# Altium PCB PCB_Ecoder_Optic_Sensor_SMT-RA.PcbDoc
Units mm, origin at the board's own origin, x right, y up, seen from the top; angles counter-clockwise.
Board outline 20.6 x 27 mm, 2 copper layers (Top Layer, Bottom Layer), stack 1.571 mm thick; 33 components, 15 nets, 89 pads, 23 vias.
Unrouted connection lines stored in the file: 4.
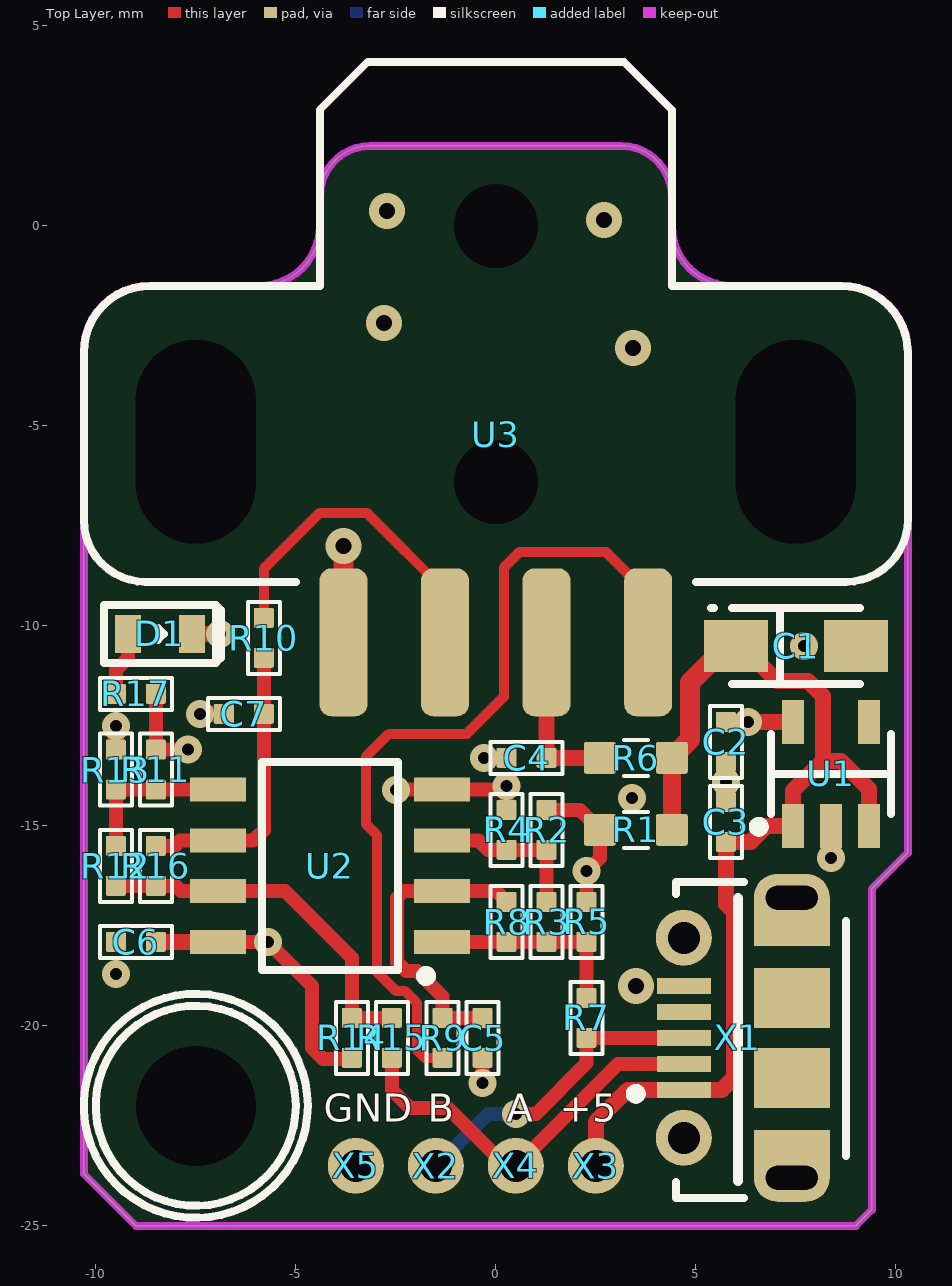
[diagram p0: Top Layer view]
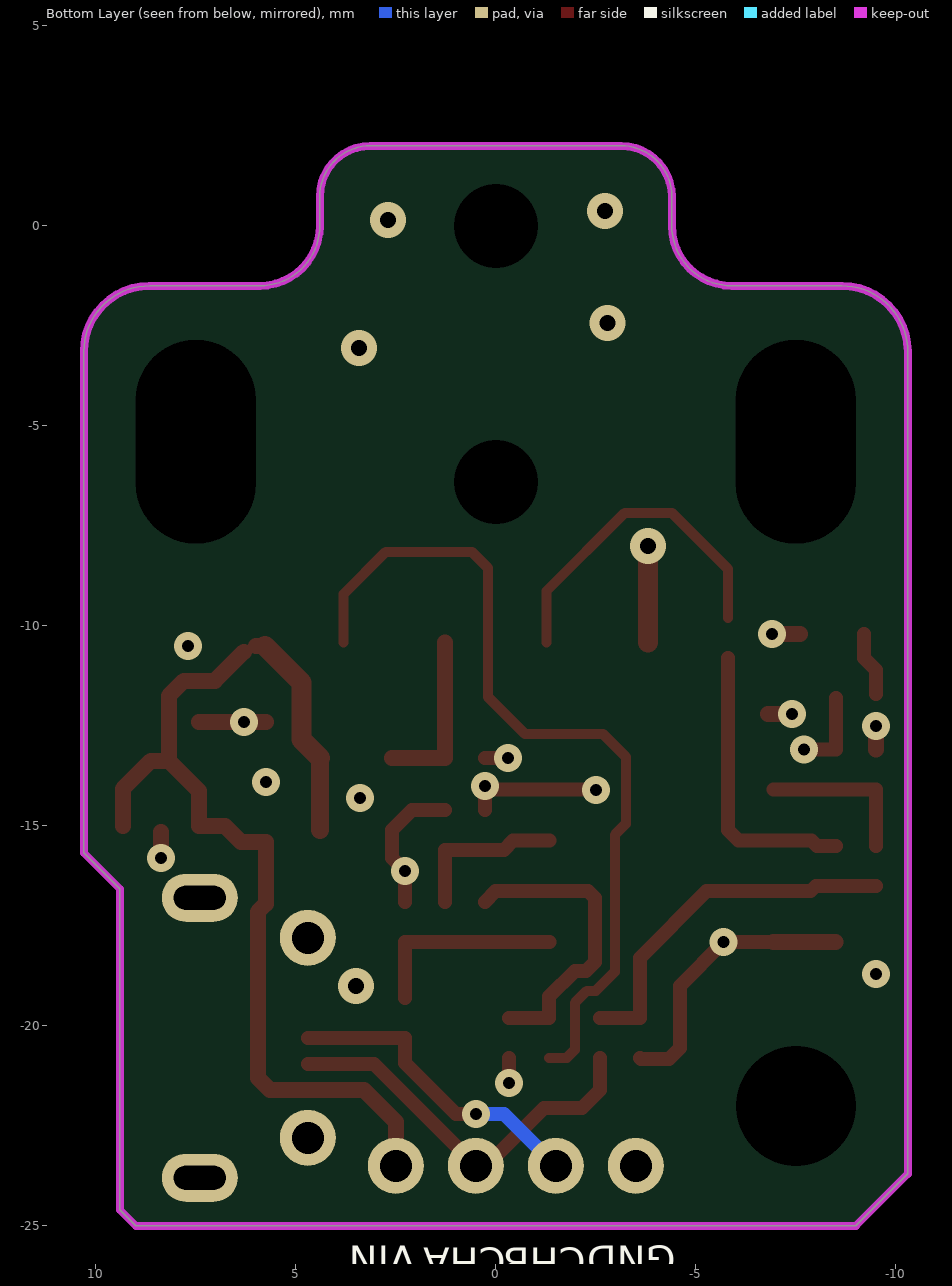
[diagram p1: Bottom Layer view, seen from below]
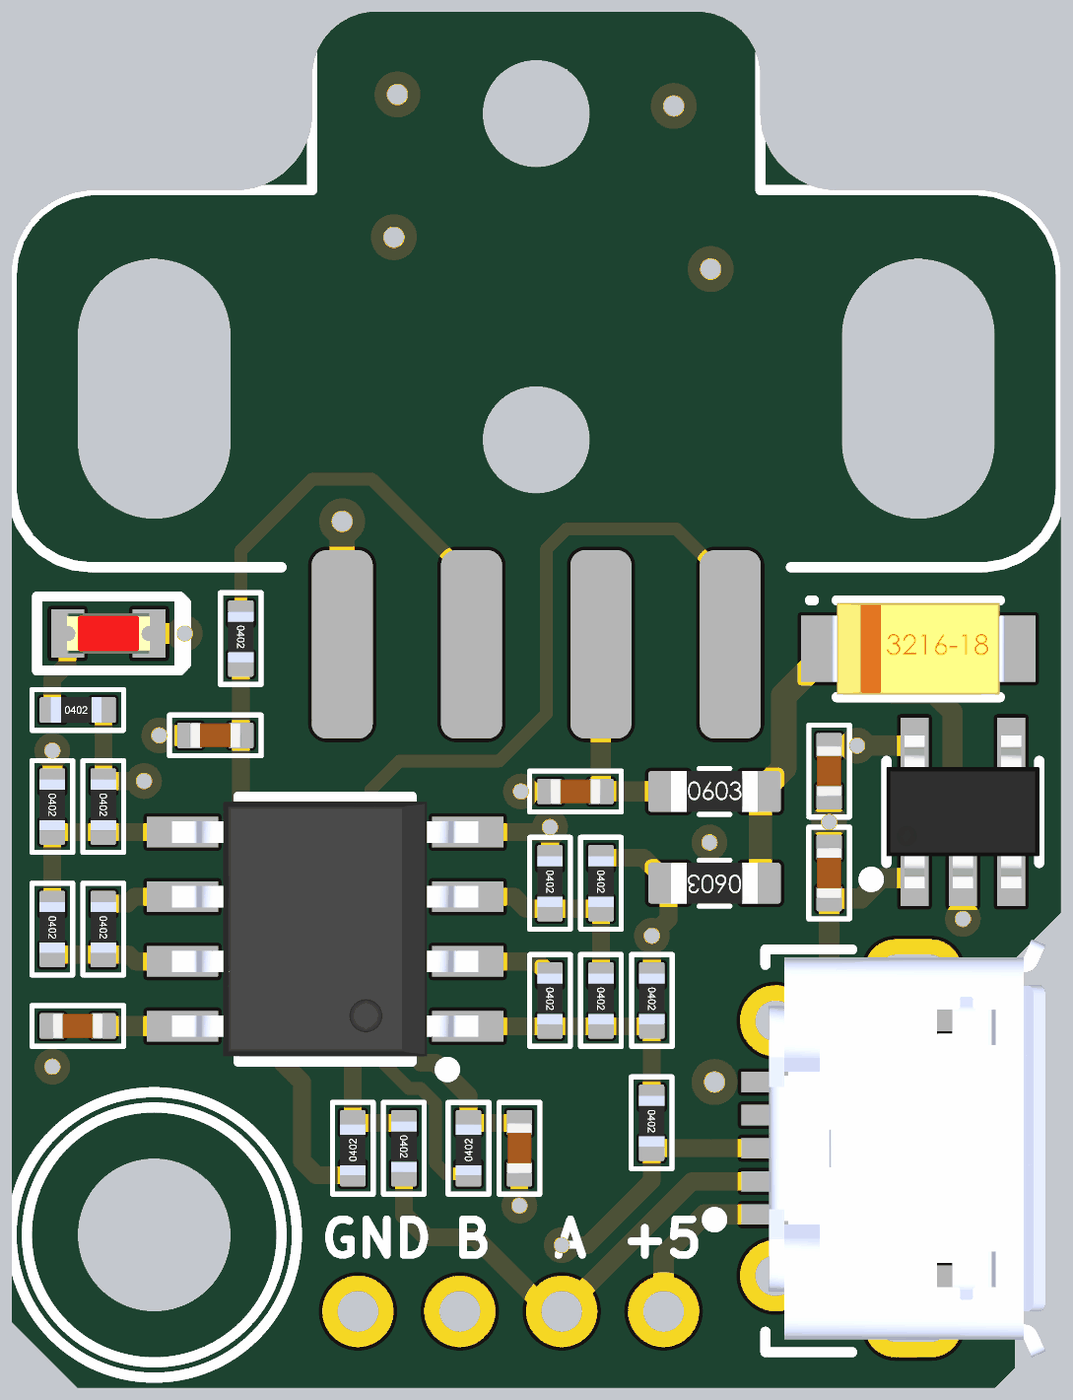
[diagram p2: 3D render of the assembled board from above, using the file's embedded part models]

## Layer stack, top to bottom
Top Solder: solder mask 0.0102, Solder Resist, Dk 3.5
Top Layer: signal copper 0.0356
Dielectric 1: dielectric 1.5, FR-4, Dk 4.8
Bottom Layer: signal copper 0.0356
Bottom Solder: solder mask 0.0102, Solder Resist, Dk 3.5

## Board outline
-10.3,-23.7 -9,-25 9,-25 9.4,-24.6 9.4,-16.575 10.3,-15.675 10.3,-3.148 ccw(c8.652,-3.148) 8.652,-1.5 5.9,-1.5 cw(c5.9,0) 4.4,0 4.4,0.73 ccw(c3.13,0.73) 3.13,2 -3.13,2 ccw(c-3.13,0.73) -4.4,0.73 -4.4,0 cw(c-5.9,0) -5.9,-1.5 -8.652,-1.5 ccw(c-8.652,-3.148) -10.3,-3.148

## Design rules (kind name [scope] priority, off if disabled: settings)
Clearance Clearance_KeepOut_Oll [OnLayer('Keep-Out Layer') vs OnLayer('Top Layer') Or OnLayer('Bottom Layer')] p1: gap=0.35 ignorepadtopadclearanceinfootprint=FALSE except(0: Arc-Hole Track-Hole SMDPad-Hole THPad-Hole Via-Hole Fill-Hole Poly-Hole Region-Hole Text-Hole)
Clearance Clearance_Hole_All [IsPad and (PadIsPlated <> 'True')] p2: gap=0.35 ignorepadtopadclearanceinfootprint=FALSE except(0: Arc-Hole Track-Hole SMDPad-Hole THPad-Hole Via-Hole Fill-Hole Poly-Hole Region-Hole Text-Hole)
Clearance Clearance_AllPoligon_All [InPoly] p3: gap=0.2 ignorepadtopadclearanceinfootprint=FALSE except(0: Arc-Hole Track-Hole SMDPad-Hole THPad-Hole Via-Hole Fill-Hole Poly-Hole Region-Hole Text-Hole)
Clearance [All] p4: gap=0.2 ignorepadtopadclearanceinfootprint=FALSE except(0: Arc-Hole Track-Hole SMDPad-Hole THPad-Hole Via-Hole Fill-Hole Poly-Hole Region-Hole Text-Hole)
ComponentClearance [All] p1: gap=0 collisioncheckmode=3 verticalgap=0 showdistances=FALSE
HoleSize [All] p1: absolutevalues=TRUE maxlimit=6 minlimit=0.2 maxpercent=80.000 minpercent=20.000
HoleToHoleClearance [All] p1: gap=0.25 allowstackedmicrovias=TRUE
MinimumSolderMaskSliver [All] p1: minsoldermaskwidth=0.06
MinimumSolderMaskSliver SilkscreenOverComponentPads [All] p2: minsoldermaskwidth=0.254
PlaneConnect [All] p1: planeconnectstyle=Relief reliefexpansion=0.1 reliefentries=4 reliefconductorwidth=0.4 reliefairgap=0.2
PolygonConnect PolygonConnect_isVia [IsVia] p1: connectstyle=Direct reliefconductorwidth=0.254 reliefentries=4 polygonreliefangle="90 Angle" airgapwidth=0.254
PolygonConnect [All] p2: connectstyle=Relief reliefconductorwidth=0.4 reliefentries=4 polygonreliefangle="90 Angle" airgapwidth=0.2
RoutingCorners [All] p1: cornerstyle=45-Degree minsetback=0.5 maxsetback=5
RoutingVias [All] p1: holewidth=0.6 width=0.9 viastyle="Through Hole" minholewidth=0.2 minwidth=0.6 maxholewidth=5 maxwidth=8
ShortCircuit [InNet('GND') vs InNet('NetC13_2')] p1: allowed=TRUE
ShortCircuit ShortCircuit_1 [All] p2: allowed=FALSE
SilkToSilkClearance [All] p1: silktosilkclearance=0.102
SilkToSolderMaskClearance [IsPad] p1: minsilkscreentomaskgap=0.102 clearancetoexposedcopper=TRUE
SolderMaskExpansion [All] p1: expansion=0.07
Width [All] p1: maxlimit=2 minlimit=0.18 preferedwidth=0.4
21 further rules are at their usual default settings.

## Components (designator, comment, footprint, x,y, rotation, side; value= is the part's Value field where it differs from the comment)
C1 "TCAP CASE A" "TCAP SMA" 7.5,-10.5 r0 top value=22uF
C2 "Ceramic Capacitor X7R 10% 50V" C0402-h0.5-O 5.75,-12.9 r90 top value=100nF
C3 "Ceramic Capacitor X7R 10% 50V" C0402-h0.5-O 5.75,-14.9 r270 top value=100nF
C4 "Ceramic Capacitor X7R 10% 50V" C0402-h0.5-O 0.77,-13.3 r0 top value=100nF
C5 "Ceramic Capacitor X7R 10% 50V" C0402-h0.5-O -0.33,-20.3 r90 top value=33pF
C6 "Ceramic Capacitor X7R 10% 50V" C0402-h0.5-O -9,-17.9 r0 top value=100nF
C7 "Ceramic Capacitor X7R 10% 50V" C0402-h0.5-O -6.3,-12.2 r0 top value=33pF
D1 "LED 0603" "LED 0603_RED" -8.4,-10.2 r0 top value=RED
R1 "Thick Film Resistor 0603 5%" R0603 3.5,-15.1 r180 top value=DNP
R2 "Thick Film Resistor 0402 5%" R0402-O 1.27,-15.1 r270 top value=3.3k
R3 "Thick Film Resistor 0402 5%" R0402-O 1.27,-17.4 r270 top value=22k
R4 "Thick Film Resistor 0402 5%" R0402-O 0.27,-15.1 r270 top value=1.2k
R5 "Thick Film Resistor 0402 5%" R0402-O 2.27,-17.4 r270 top value=1k
R6 "Thick Film Resistor 0603 5%" R0603 3.5,-13.3 r0 top value=180R
R7 "Thick Film Resistor 0402 5%" R0402-O 2.265,-19.8 r270 top value=50R
R8 "Thick Film Resistor 0402 5%" R0402-O 0.27,-17.4 r270 top value=DNP
R9 "Thick Film Resistor 0402 5%" R0402-O -1.33,-20.3 r90 top value=180R
R10 "Thick Film Resistor 0402 5%" R0402-O -5.8,-10.3 r270 top value=180R
R11 "Thick Film Resistor 0402 5%" R0402-O -8.5,-13.595 r270 top value=3.3k
R12 "Thick Film Resistor 0402 5%" R0402-O -9.5,-16 r270 top value=22k
R13 "Thick Film Resistor 0402 5%" R0402-O -9.5,-13.595 r270 top value=1.2k
R14 "Thick Film Resistor 0402 5%" R0402-O -3.6,-20.3 r90 top value=1k
R15 "Thick Film Resistor 0402 5%" R0402-O -2.6,-20.3 r270 top value=50R
R16 "Thick Film Resistor 0402 5%" R0402-O -8.5,-16 r270 top value=DNP
R17 "Thick Film Resistor 0402 5%" R0402-O -9,-11.7 r0 top value=1.2k
U1 "TLV70233" SOT-23-5 8.375,-13.7 r90 top
U2 "LM2903" SOIC-8-150 -4.145,-16 r180 top
U3 "Q9845" "SENSOR_OPTO-Encoder Rp" 0,0 r180 top locked
X1 "ZX62-AB-5PA(11)" USB_micro_TH 9.6,-20.3 r270 top locked
X2 "PAD_C_1.2MM" PAD_C_1.2mm -1.5,-23.5 r90 top
X3 "PAD_C_1.2MM" PAD_C_1.2mm 2.5,-23.5 r90 top
X4 "PAD_C_1.2MM" PAD_C_1.2mm 0.5,-23.5 r90 top
X5 "PAD_C_1.2MM" PAD_C_1.2mm -3.5,-23.5 r90 top

## Footprints (in the part's own frame and the unit in brackets; to place one, negate y for a bottom-side part, rotate by r counter-clockwise, add the part's x,y. Pads: shape width x height; smd on the part's side, far side on the other; paste and mask are expansions set on the pad)
C0402-h0.5-O [mm] "Ceramic Capacitor SMT 0402 h=0.5 outline"
  rrect15% 0.5x0.5 smd mask+0.05: 1(-0.5,0) 2(0.5,0)
  silkscreen extent -0.9,-0.4 0.9,0.4, body extent -0.5,-0.25 0.5,0.25, height 0.51
"LED 0603_RED" [mm]
  rect 0.65x0.95 smd: 1(-0.8,0) 2(0.8,0)
  silkscreen extent -1.4,-0.72 1.53,0.72, body extent -0.81,-0.4 0.81,0.4, height 0.6
PAD_C_1.2mm [mm]
  round 1.4 hole 0.8: 1(0,0)
R0402-O [mm]
  rrect15% 0.5x0.5 smd mask+0.05: 1(-0.5,0) 2(0.5,0)
  silkscreen extent -0.9,-0.4 0.9,0.4, body extent -0.53,-0.25 0.47,0.25, height 0.36
R0603 [mm]
  rrect15% 0.8x0.8 smd: 1(-0.9,0) 2(0.9,0)
  silkscreen extent -0.3,-0.45 0.3,0.45, body extent -0.85,-0.4 0.85,0.4, height 0.56
"SENSOR_OPTO-Encoder Rp" [mm] "HEDS-97** Option 51"
  round 0 hole 3 slot 5.1 at 90 deg unplated: 0(-7.5,5.4) 0(7.5,5.4)
  round 0 hole 2.1 unplated: 0(0,6.4) 0(0,0)
  rrect50% 1.2x3.7 smd: 1(3.81,10.414) 2(1.27,10.414) 3(-1.27,10.414) 4(-3.81,10.414)
  silkscreen extent -10.3,-4.1 10.3,8.9, body extent -10.1,-3.9 10.1,11.95, height 10.8
SOIC-8-150 [mm]
  rect 1.4x0.6 smd: 1(-2.8,1.905) 2(-2.8,0.635) 3(-2.8,-0.635) 4(-2.8,-1.905) 5(2.8,-1.905) 6(2.8,-0.635) 7(2.8,0.635) 8(2.8,1.905)
  silkscreen extent -2.53,-2.6 1.7,2.88, body extent -3.01,-2.5 3.01,2.5, height 1.75
SOT-23-5 [mm] "SOT23, 5-Leads, Body 3,0x2,6mm, Pitch 0,95mm"
  rect 1.1x0.55 smd: 1(-1.3,0.95) 2(-1.3,0) 3(-1.3,-0.95) 4(1.3,-0.95) 5(1.3,0.95)
  silkscreen extent -1.45,-1.5 1,1.92, body extent -1.5,-1.5 1.5,1.5, height 1.45
"TCAP SMA" [mm]
  rect 1.6x1.3 smd: +(-1.5,0) -(1.5,0)
  silkscreen extent -2.12,-0.95 1.6,0.95, body extent -1.7,-0.9 1.7,0.9, height 1.7
USB_micro_TH [mm] "USB micro B 5 Position Board Cutout, Surface Mount, Right Angle"
  rect 0.4x1.35 smd: 1(1.3,-4.9) 2(0.65,-4.9) 3(0,-4.9) 4(-0.65,-4.9) 5(-1.3,-4.9)
  oval 1.2x1.9 hole 0.6 slot 1.3 at 90 deg: SH(-3.5,-2.2) SH(3.5,-2.2)
  rect 1.2x1.9 smd: SH(-2.9,-2.2) SH(2.9,-2.2)
  round 1.4 hole 0.8: SH(-2.5,-4.9) SH(2.5,-4.9)
  rect 1.5x1.9 smd: SH(-1,-2.2) SH(1,-2.2)
  silkscreen extent -3.9,-6.22 4,-3.4, body extent -4.1,-5.03 4.1,0.4, height 2.68

## Part data
C1: "Tantal Capacitor SMA", LatestRevisionDate=25.01.2012, PackageDescription="SMT case A"
C2 C3 C4 C5 C6 C7: library part "Cap CER 0402 S", "Multilayer ceramic capacitors  0402", Case=0402, Designer=Crom, LatestRevisionDate=19.05.14
D1: "Typical SMT LED", LatestRevisionDate=14.06.17
R1 R6: library part "Res 0603", "Chip Resistor 0603 (1608)", Case=0603, Designer=Crom, Latest Revision=19.05.14
R2 R3 R4 R5 R7 R8 R9 R10 R11 R12 R13 R14 R15 R16 R17: library part "Res 0402", "Chip Resistor 0402 (1005) 1/16W", Case=0402, Designer=Crom, LatestRevisionDate=19.05.14
U1: "LDO 3.3V 300mA"
U2: library part "LM293 / LM2903", "Dual Differential Comparators"
U3: library part Optic_Encoder_Sensor, "Small Optical Encoder Module (HEDS-97xx)"
X1: library part USB_micro, "USB micro AB SMT R/A", link=http://www.digikey.com/product-detail/en/ZX62-AB-5PA%2811%29/H11635CT-ND/1993370
X2 X3 X4 X5: library part PAD_1.2MM, "1x1x0.8mm hole"

## Free pads (board coordinates)
  round 1.524 hole 3 unplated: 0(-7.5,-22)

## Via types
v1: diameter 0.7, hole 0.3, Top Layer to Bottom Layer, tented both sides, 17 vias
v2: diameter 0.9, hole 0.4, Top Layer to Bottom Layer, tented both sides, 6 vias

## Nets (pads, with @x,y where several pads share a name; then routed paths per layer and width w, separated by ;. In a path a pad name is that pad's centre, name@x,y a point inside that pad or via, vN(x,y) a via of type N, cw(c..) or ccw(c..) an arc to the next point about the centre after c; other vN are vias at no path point)
GND: C1.- C2.1 C3.1 C4.1 C5.1 C6.1 C7.1 D1.2 R4.1 R13.1 U1.2 U2.4 U3.1 X1.5 X1.SH X5.1 | length 9.7
  Top Layer w0.35: v1(-2.5,-14.1) -2.495,-14.095 U2.4 0.175,-14.095 v1(0.27,-14) R4.1 ; v1(-0.33,-21.425) C5.1 ; v1(-0.3,-13.3) -0.35,-13.3 C4.1
  Top Layer w0.4: R13.1 v1(-9.5,-12.5) ; D1.2 v1(-6.9,-10.2) ; v1(-7.4,-12.2) C7.1 ; v1(8.375,-15.8) U1.2@8.375,-15.15
  Top Layer w0.5: U3.1 v2(-3.81,-8)
  other v1: -9.5,-18.7 5.75,-13.9 7.7,-10.5
  other v2: 3.5,-19 3.425,-3.05 -2.795,-2.425 2.7,0.15 -2.725,0.375
NetC4_2: C4.2 R6.1 U3.3 | length 4.2
  Top Layer w0.4: U3.3 C4.2 R6.1
NetD1_1: D1.1 R17.1 | length 1.6
  Top Layer w0.35: R17.1 -9.5,-11.1 -9.2,-10.8 D1.1
NetR2_2: R2.2 R3.1 R4.2 U2.3 | length 4
  Top Layer w0.35: U2.3 -0.435,-15.365 -0.2,-15.6 R4.2 R2.2 ; R3.1 R2.2
NetR3_2: R3.2 R5.2 R7.1 R8.2 U2.1 | length 5
  Top Layer w0.35: U2.1 R5.2@2.265,-17.905 ; R7.1 R5.2@2.265,-17.905 ; R5.2 R5.2@2.265,-17.905
NetR9_1: R9.1 U3.4 | length 21.4
  Top Layer w0.25: R9.1 -1.775,-20.8 -1.975,-20.6 -1.975,-19.425 -2.275,-19.125 -2.5,-19.125 -2.975,-18.65 -2.975,-15.225 -3.25,-14.95 -3.25,-13.275 -2.675,-12.7 -0.725,-12.7 0.2,-11.775 0.2,-8.55 0.6,-8.15 2.75,-8.15 3.81,-9.21 U3.4
NetR10_1: R10.1 U3.2 | length 8.4
  Top Layer w0.25: R10.1 -5.8,-8.575 -4.4,-7.175 -3.225,-7.175 -1.27,-9.13 U3.2
NetR11_2: R11.2 R12.1 R13.2 U2.5 | length 4
  Top Layer w0.35: R12.1 R13.2 R11.2 U2.5
NetR12_2: R12.2 R14.2 R15.1 R16.2 U2.7 | length 9.1
  Top Layer w0.35: R12.2 R16.2 -8,-16.5 -7.865,-16.635 U2.7 -5.265,-16.635 -3.6,-18.3 R14.2 R15.1
OUT_CHA: R15.2 X1.2 X4.1 | length 10
  Top Layer w0.35: R15.2 -2.6,-21.6 -2.15,-22.05 -1.2,-22.05 X4.1@0.5,-23.75 ; X4.1 3.05,-20.95 X1.2
OUT_CHB: R7.2 X1.3 X2.1 | length 7.9
  Top Layer w0.35: v1(0.5,-22.2) 1,-22.2 2.265,-20.935 R7.2 X1.3
  Bottom Layer w0.35: X2.1 -0.2,-22.2 v1(0.5,-22.2)
SENSOR_CHA: C7.2 R10.2 R16.1 U2.6 | length 7.2
  Top Layer w0.35: R16.1 -8.025,-15.5 -7.89,-15.365 U2.6 -6.065,-15.365 -5.8,-15.1 C7.2 R10.2
SENSOR_CHB: C5.2 R8.1 R9.2 U2.2 | length 7.6
  Top Layer w0.35: C5.2 R9.2 -1.33,-19.27 -1.975,-18.625 -2.25,-18.625 -2.475,-18.4 -2.475,-16.8 -2.31,-16.635 U2.2 0.005,-16.635 R8.1
VCC: C2.2 C6.2 R1.2 R2.1 R5.1 R11.1 R14.1 R17.2 U1.5 U2.8 | length 14.3
  Top Layer w0.35: C6.2 C6.2@-8.495,-17.905 ; R17.2@-8.5,-11.8 R11.1 v1(-7.7,-13.095) ; U2.8 v1(-5.695,-17.905) -4.6,-19 -4.6,-20.55 -4.325,-20.825 -3.625,-20.825 R14.1 ; R2.1 2.1,-14.6 R1.2 2.6,-15.8 v1(2.27,-16.13) R5.1
  Top Layer w0.4: C6.2@-8.495,-17.905 U2.8 ; C2.2 U1.5
  other v1: 3.4,-14.3 6.3,-12.4
VIN: C1.+ C3.2 R1.1 R6.2 U1.1 U1.3 X1.1 X3.1 | length 26.5
  Top Layer w0.4: X3.1 2.5,-22.4 3.3,-21.6 X1.1 5.65,-21.6 5.95,-21.3 5.95,-17.15 5.75,-16.95 C3.2 6.375,-15.4 6.775,-15 U1.1 7.425,-14.125 8.175,-13.375 ; C1.+@5.775,-10.5 C1.+ ; C1.+@6.3,-10.65 7.025,-11.375 7.8,-11.375 8.175,-11.75 8.175,-13.375 ; U1.3 9.325,-14.075 8.625,-13.375 8.175,-13.375
  Top Layer w0.45: R1.1 R6.2
  Top Layer w0.5: R6.2 4.86,-12.84 4.86,-11.415 C1.+@5.775,-10.5
pads on no net: U1.4 U3.0 X1.4

## Keep-outs
Keep-Out Layer:
  lines w0.2: -10.3,-23.7 -9,-25 9,-25 9.4,-24.6 9.4,-16.575 10.3,-15.675 10.3,-3.148 ccw(c8.652,-3.148) 8.652,-1.5 5.9,-1.5 cw(c5.9,0) 4.4,0 4.4,0.73 ccw(c3.13,0.73) 3.13,2 2.552,2 0,2 -2.552,2 -3.13,2 ccw(c-3.13,0.73) -4.4,0.73 -4.4,0 cw(c-5.9,0) -5.9,-1.5 -8.652,-1.5 ccw(c-8.652,-3.148) -10.3,-3.148 -10.3,-23.7

## Silkscreen, mask and mechanical layers (free items; w line width, h text height)
Top Overlay:
  circle w0.2: c-7.5,-22 r2.5
  circle w0.2: c-7.5,-22 r2.8
  lines w0.2: 8.753,-23.25 8.753,-17.375
  lines w0.25: 6.05,-23.875 6.05,-16.8
  text "GND" at -4.3,-22.4 h0.7
  text "B" at -1.7,-22.4 h0.7
  text "A" at 0.27,-22.4 h0.7
  text "+5" at 1.6,-22.4 h0.7
Bottom Overlay:
  text "GND" at -4.5,-25.5 h0.7 r180
  text "VIN" at 2,-25.5 h0.7 r180
  text "CHB" at -2.25,-25.55 h0.7 r180
  text "CHA" at -0.25,-25.55 h0.7 r180